# Altium PCB 2012_AVR.PcbDoc
Units mil, origin at the board's own origin, x right, y up, seen from the top; angles counter-clockwise.
Board outline 3543.31 x 2559.06 mil, 2 copper layers (Top Layer, Bottom Layer); 104 components, 103 nets, 433 pads, 213 vias.
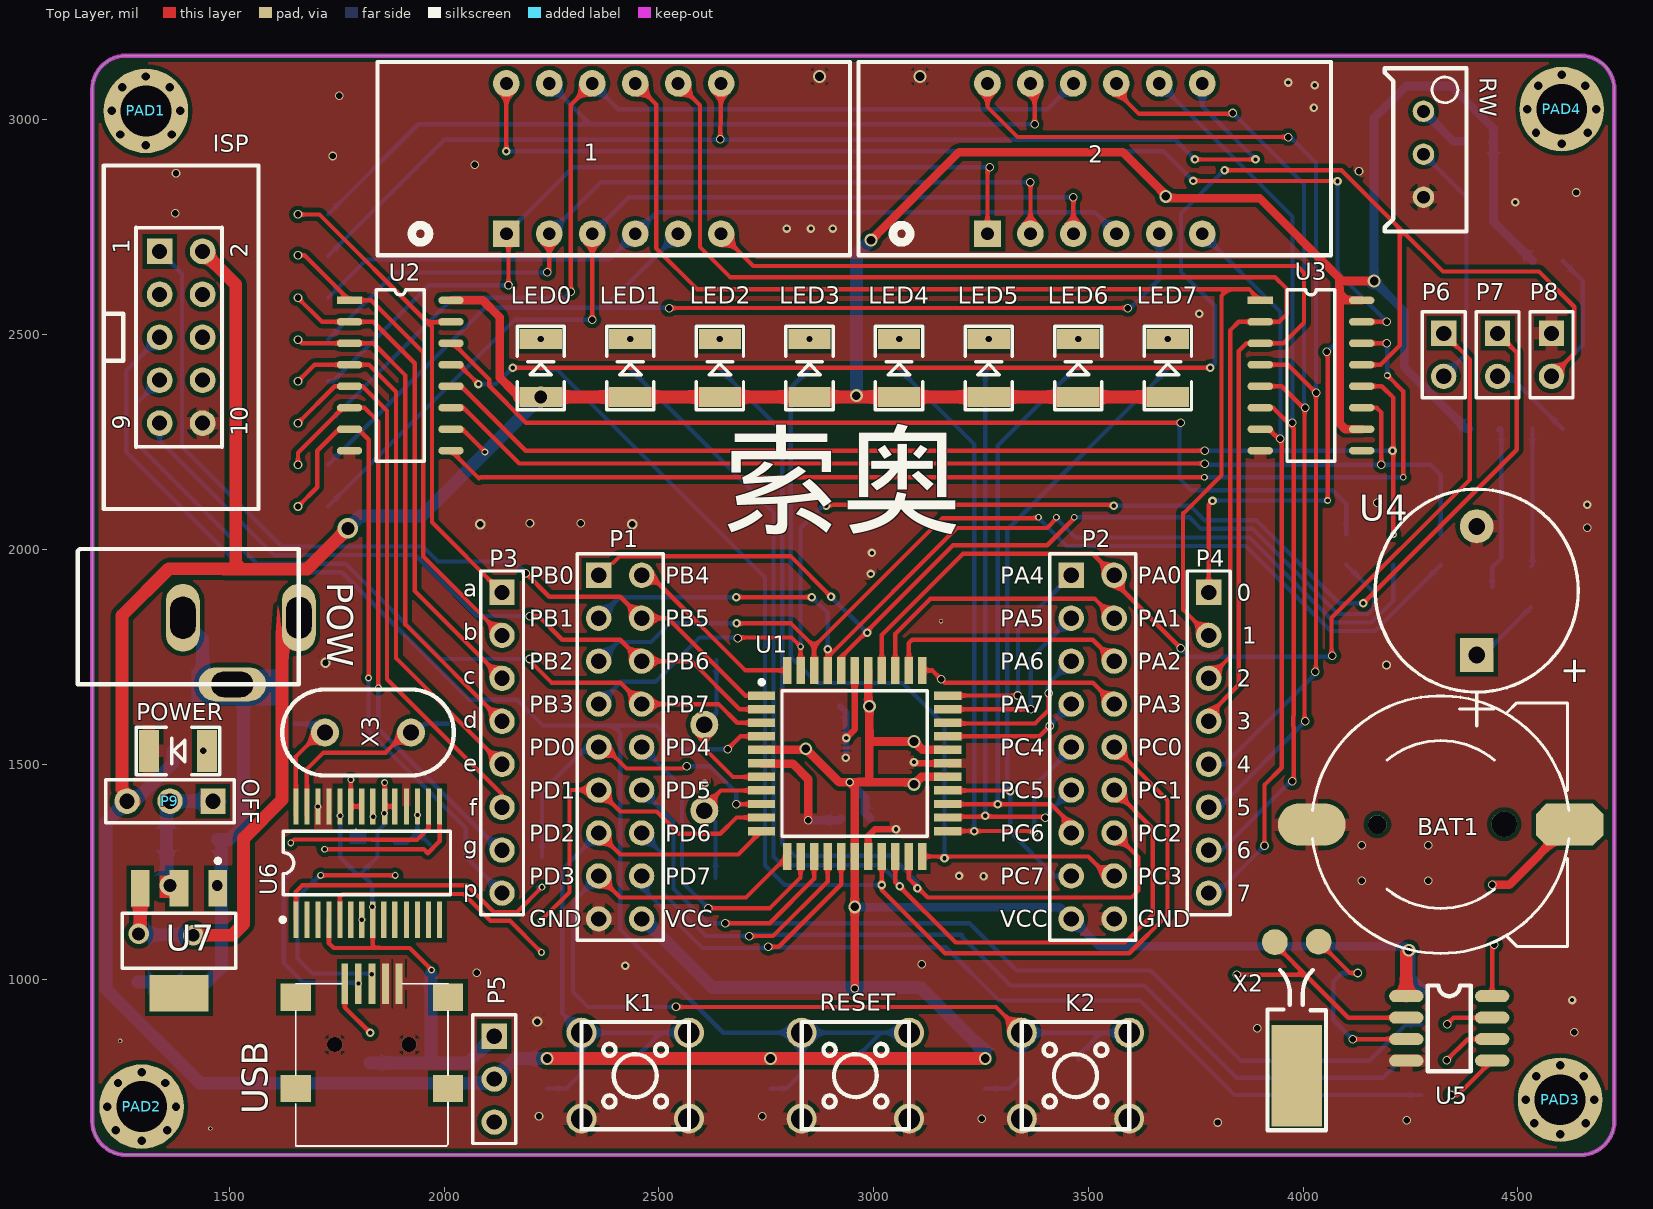
[diagram p0: Top Layer view]
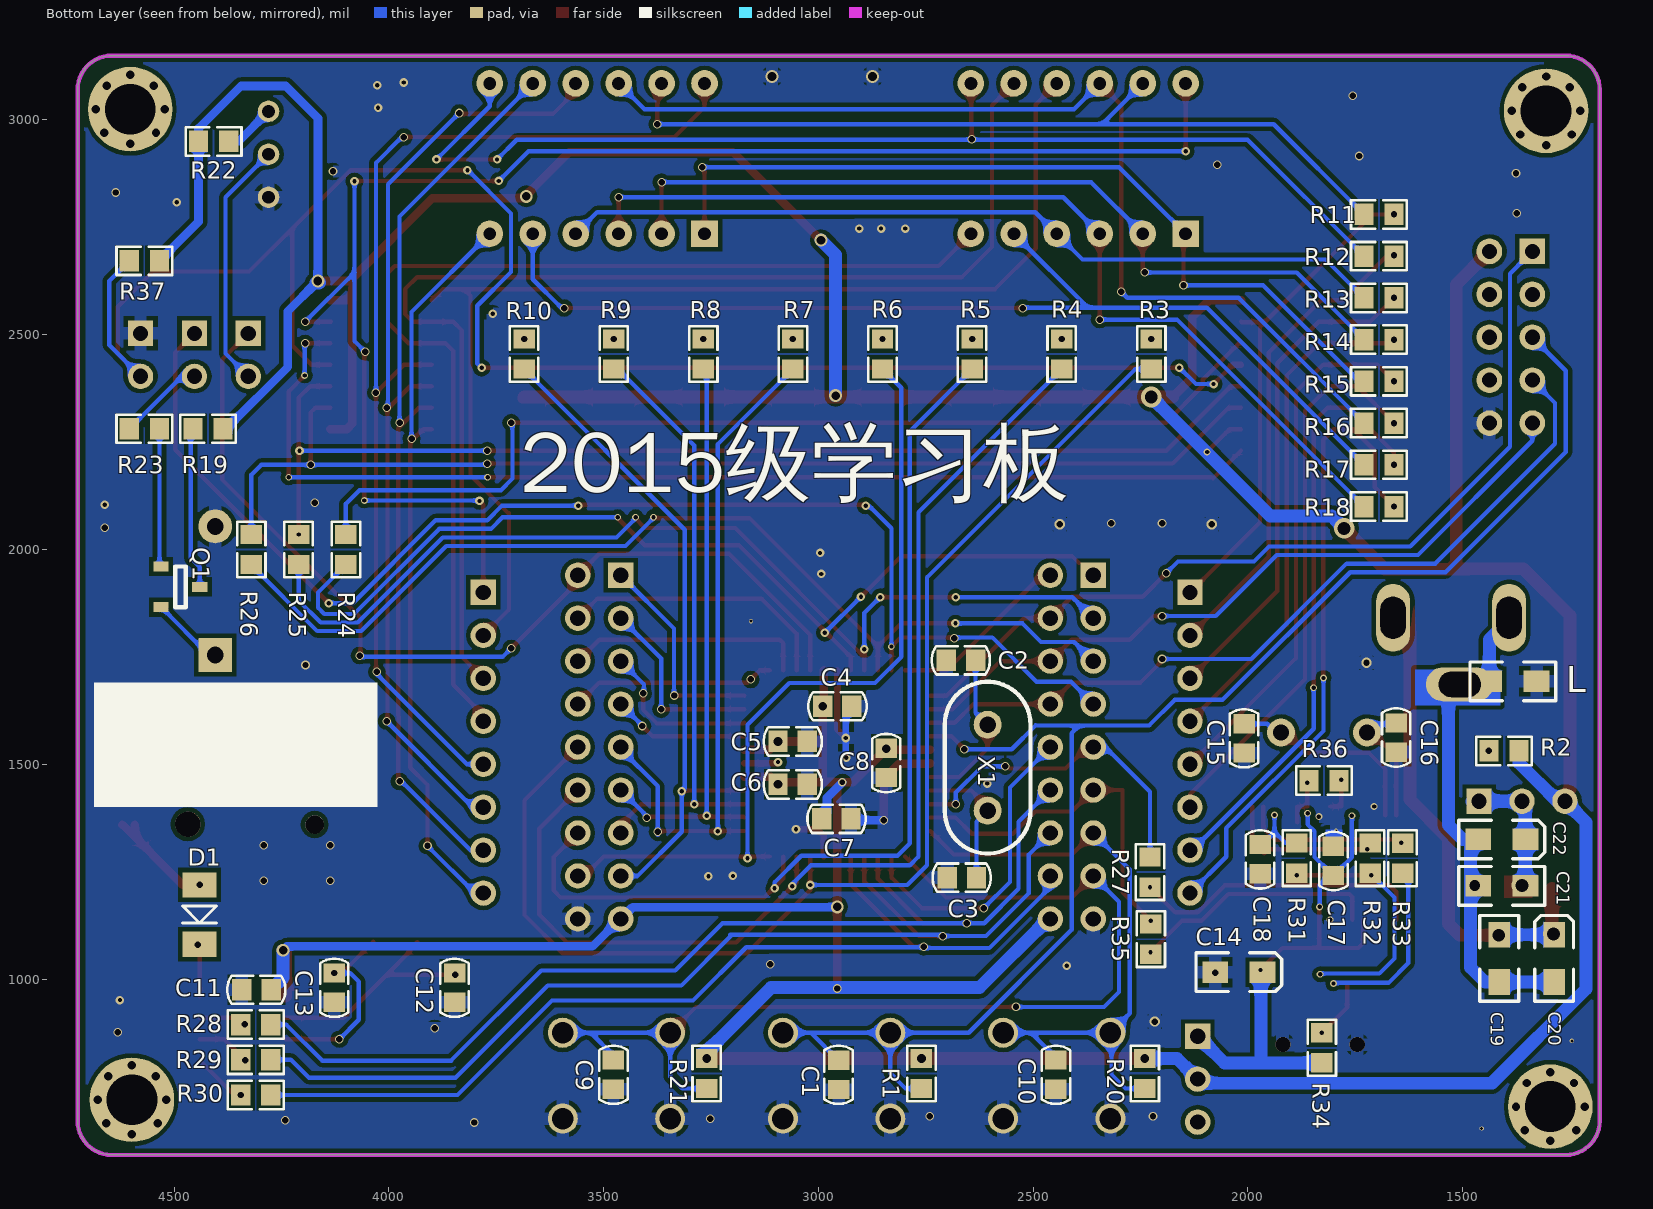
[diagram p1: Bottom Layer view, seen from below]

## Layer stack, top to bottom
Top Solder: solder mask 0.4, Solder Resist, Dk 3.5
Top Layer: signal copper 1.4
Dielectric1: dielectric 12.6, FR-4, Dk 4.8
Bottom Layer: signal copper 1.4
Bottom Solder: solder mask 0.4, Solder Resist, Dk 3.5

## Board outline
1181.1,669.29 1181.1,3070.87 cw(c1259.84,3070.87) 1259.84,3149.61 4645.67,3149.61 cw(c4645.67,3070.87) 4724.41,3070.87 4724.41,669.29 cw(c4645.67,669.29) 4645.67,590.55 1259.84,590.55 cw(c1259.84,669.29)

## Design rules (kind name [scope] priority, off if disabled: settings)
Clearance [All] p1: gap=10
ComponentClearance [All] p1: gap=0 collisioncheckmode=3 verticalgap=0 showdistances=FALSE
FabricationTestPointUsage TestPointUsage [All] p1: valid=0 allowmultiple=FALSE
FabricationTestpoint Testpoint [(IsPad And (OnTopLayer Or OnBottomLayer))] p1: side=3 testpointundercomponent=TRUE minsize=40 maxsize=100 preferedsize=60 minholesize=0 maxholesize=40 preferedholesize=32 testpointgrid=1 allowsidetop=TRUE allowsidebottom=TRUE usegrid=TRUE gridtolerance=0.01
HoleSize [All] p1: absolutevalues=TRUE maxlimit=393.7 minlimit=1 maxpercent=80.000 minpercent=20.000
HoleToHoleClearance [All] p1: gap=0 allowstackedmicrovias=TRUE
MinimumSolderMaskSliver [All] p1: minsoldermaskwidth=0
PolygonConnect [All] p1: connectstyle=Relief reliefconductorwidth=30 reliefentries=4 polygonreliefangle="90 Angle" airgapwidth=10
RoutingVias [All] p1: holewidth=28 width=50 viastyle="Through Hole" minholewidth=0 minwidth=0 maxholewidth=393.7 maxwidth=393.7
SilkToSilkClearance [All] p1: silktosilkclearance=0
SilkToSolderMaskClearance SilkscreenOverComponentPads [IsPad] p1: minsilkscreentomaskgap=0 clearancetoexposedcopper=TRUE
SolderMaskExpansion [All] p1: expansion=4
Width [All] p1: maxlimit=1000 minlimit=99999 preferedwidth=10 toplayer_minwidth=0 bottomlayer_minwidth=0 minimp=50.000000 maximp=50.000000 favimp=50.000000
22 further rules are at their usual default settings.

## Components (designator, comment, footprint, x,y, rotation, side; value= is the part's Value field where it differs from the comment)
1 "7SEG_1" DSP-4 2145,2735 r0 top
2 "7SEG_1" DSP-4 3265,2735 r0 top
BAT1 "BATTERY" BAT600 4620,1360 r270 top
C1 "0.1uF" C0704 2960,776.67 r270 bottom
C2 "20pF" C0704 2668,1735 r180 bottom
C3 "20pF" C0704 2666,1229 r180 bottom
C4 "0.1uF" C0704 2956,1642 r0 bottom
C5 "0.1uF" C0704 3060,1560 r0 bottom
C6 "0.1uF" C0704 3060,1460 r0 bottom
C7 "0.1uF" C0704 2958,1380 r0 bottom
C8 "0.1uF" C0704 2835,1503 r90 bottom
C9 "0.1uF" C0704 3470,777.5 r90 bottom
C10 "0.1uF" C0704 2440,777.5 r90 bottom
C11 "0.1uF" C0704 4308,968 r180 bottom
C12 "20pF" C0704 3840,980 r90 bottom
C13 "20pF" C0704 4120,980 r90 bottom
C14 "Cap Pol1" 3216C 1966,1016 r180 bottom
C15 "22pF" C0704 2016,1560 r270 bottom
C16 "22pF" C0704 1662,1562 r270 bottom
C17 "0.1uF" C0704 1794,1275 r90 bottom
C18 "0.1uF" C0704 1964.67,1279 r90 bottom
C19 "104" 0805 1395,1313 r90 bottom
C20 "10uF" 3216C 1287,1103 r90 bottom
C21 "104" 0805 1144,1197 r180 bottom
C22 "100uF" 3216C 1354,1325 r180 bottom
D1 "1N4148" D1206 4440,1220 r270 bottom
ISP "ISP2*5" ISP(2*5) 1338,2694 r90 top (schematic designator ISP1)
K1 "SWITCH-PB1" SW-6-6 2445,775 r270 top
K2 "SWITCH-PB1" SW-6-6 3470,775 r270 top
L "1K" 0805 1648,1713 r0 bottom
LED0 "LED" 1210LED 2225,2355 r90 top
LED1 "LED" 1210LED 2433.57,2355 r90 top
LED2 "LED" 1210LED 2642.14,2355 r90 top
LED3 "LED" 1210LED 2850.71,2355 r90 top
LED4 "LED" 1210LED 3059.29,2355 r90 top
LED5 "LED" 1210LED 3267.86,2355 r90 top
LED6 "LED" 1210LED 3476.43,2355 r90 top
LED7 "LED" 1210LED 3685,2355 r90 top
P1 "Header 9X2" HDR2X9 2360,1940 r270 top
P2 "Header 9X2" HDR2X9 3460,1940 r270 top
P3 "Header 8" HDR1X8 2135,1900 r270 top
P4 "Header 8" HDR1X8 3780,1900 r270 top
P5 "Header 3" HDR1X3 2117,867 r270 top (schematic designator P6)
P6 "Header 2" HDR1X2 4327,2503 r270 top (schematic designator P5)
P7 "Header 2" HDR1X2 4452.5,2503 r270 top
P8 "Header 2" HDR1X2 4578,2503 r270 top
P9 "Power Switch" HDR1X3 1462,1414 r180 top
PAD1 "hotpad" hot_pad 1306,3021 r0 top
PAD2 "hotpad" hot_pad 1296,703 r0 top
PAD3 "hotpad" hot_pad 4598,719 r0 top
PAD4 "hotpad" hot_pad 4602,3025 r0 top
POW "Power_IN" BAT_PORT 1662,1686 r180 top
POWER "LED" 1210LED 1448,1531 r180 top
Q1 "1AMNPN9013" CHIP 4499,1853 r270 bottom
R1 "Res2" R0704 2760,780 r90 bottom
R2 "1K" R0704 1404,1531 r0 bottom
R3 "1K" R0704 2225,2455 r270 bottom
R4 "1K" R0704 2433.57,2455 r270 bottom
R5 "1K" R0704 2642.14,2455 r270 bottom
R6 "1K" R0704 2850.71,2455 r270 bottom
R7 "1K" R0704 3059.29,2455 r270 bottom
R8 "1K" R0704 3267.86,2455 r270 bottom
R9 "1K" R0704 3476.43,2455 r270 bottom
R10 "1K" R0704 3685,2455 r270 bottom
R11 "1K*8" R0704 1695,2780 r0 bottom
R12 "1K" R0704 1695,2682.86 r0 bottom
R13 "1K" R0704 1695,2585.71 r0 bottom
R14 "1K" R0704 1695,2488.57 r0 bottom
R15 "1K" R0704 1695,2391.43 r0 bottom
R16 "1K" R0704 1695,2294.29 r0 bottom
R17 "1K" R0704 1695,2197.14 r0 bottom
R18 "1K" R0704 1695,2100 r0 bottom
R19 "1K" R0704 4421,2281 r0 bottom
R20 "Res2" R0704 2240,780 r270 bottom
R21 "Res2" R0704 3260,780 r270 bottom
R22 "1K" R0704 4408,2950 r180 bottom
R23 "Res2" R0704 4569,2281 r0 bottom
R24 "1K" R0704 4100,2000 r270 bottom
R25 "1K" R0704 4210,2000 r270 bottom
R26 "1K" R0704 4320,2000 r270 bottom
R27 "1K" R0704 2228,1249 r90 bottom
R28 "1K" R0704 4310,894 r0 bottom
R29 "1K" R0704 4310,812 r0 bottom
R30 "1K" R0704 4310,730 r0 bottom
R31 "1K" R0704 1886.33,1281.5 r90 bottom
R32 "1K" R0704 1715.67,1281.5 r270 bottom
R33 "1K" R0704 1640,1281 r270 bottom
R34 "1K" R0704 1828,840 r90 bottom
R35 "1K" R0704 2226,1093 r90 bottom
R36 "1K" R0704 1823,1462 r180 bottom
R37 "1K" R0704 4569,2672 r0 bottom
RESET "SWITCH-PB1" SW-6-6 2957.5,775 r270 top
RW "RPOT" RW 4280,3020 r270 top (schematic designator RW1)
U1 "ATmega16-16AC" "mega16 tie" 2956,1502 r0 top
U2 "74HC595" SOP16 1780,2580 r0 top
U3 "74HC595" SOP16 3900,2580 r0 top
U4 "Comment" SPEAKER 4404,1904 r90 top
U5 "DS1302" SO-8 4240,960 r0 top
U6 "PL2303" ssop28 1655,1138 r90 top
U7 "AMS1117-5.0" DSO-G3 1383,1089 r180 top
USB "micro_USB" USBfoot 1832,867 r90 top
X1 "16M" XTAL 2606,1392 r90 bottom
X2 "32.768KHz" XTAL-B 4000,840 r90 top
X3 "12M" XTAL 1923,1574 r180 top

## Footprints (in the part's own frame and the unit in brackets; to place one, negate y for a bottom-side part, rotate by r counter-clockwise, add the part's x,y. Pads: shape width x height; smd on the part's side, far side on the other; paste and mask are expansions set on the pad)
0805 [mil]
  rect 60x50 smd: 1(-210,20) 2(-320,20)
  silkscreen extent -365,-25 -165,65
1210LED [mm]
  rect 1.2x2.5 smd: 1(0,0) 2(3.429,0)
  silkscreen extent -0.76,-1.4 4.19,1.4
3216C [mil]
  rect 60x50 smd: 1(0,0) 2(-110,0)
  silkscreen extent -155,-45 45,45
BAT600 [mm]
  round 1.5 hole 1.5: 0(-0.014,-3.866)
  round 1.1 hole 1.1: 0(0.011,-11.366)
  oct 2.5x4 smd: 1(0.011,0.004)
  oval 2.5x4 smd: 2(0.011,-15.236)
  silkscreen extent -7.61,-15.19 7.63,-0.04
BAT_PORT [mm]
  oval 2x4 hole 1.5 slot 2.5 at 90 deg: 1(0,-3.937) 2(6.858,-3.937)
  oval 4x2 hole 1.5 slot 2.5 at 0 deg: 3(3.937,0)
  silkscreen extent 0,-8 13.08,0
C0704 [mil]
  rect 45x50 smd: 1(-34,7) 2(34,7)
  silkscreen extent -68,-26 67,40
CHIP [mm]
  rect 0.6x0.9 smd: 1(-0.324,-0.801) 2(-2.724,-0.801) 3(-1.524,1.499)
  silkscreen extent -2.72,0.05 -0.32,0.66
D1206 [mm]
  rect 1.5x2 smd: 1(0.025,-0.015) 2(3.525,-0.015)
  silkscreen extent 1.28,-1.02 2.28,0.98
DSO-G3 [mm]
  rect 1.1x2.15 smd: 1(-2.3,-3.1) 2(0,-3.1) 3(2.3,-3.1)
  rect 3.5x2.15 smd: 4(0,3.1)
  silkscreen extent -3.35,-4.85 3.35,1.62
DSP-4 [mil]
  rect 62x62 hole 30: 1(0,0)
  round 62 hole 30: 2(100,0) 3(200,0) 4(300,0) 5(400,0) 6(500,0) 7(500,350) 8(400,350) 9(300,350) 10(200,350) 11(100,350) 12(0,350)
  silkscreen extent -300,-50 800,400
HDR1X2 [mm] "Connector; Header; 2 Position"
  rect 1.5x1.5 hole 0.9: 1(0,0)
  round 1.5 hole 0.9: 2(2.54,0)
  silkscreen extent -1.27,-1.27 3.81,1.27
HDR1X3 [mm] "Connector; Header; 3 Position"
  rect 1.5x1.5 hole 0.9: 1(0,0)
  round 1.5 hole 0.9: 2(2.54,0) 3(5.08,0)
  silkscreen extent -1.27,-1.27 6.35,1.27
HDR1X8 [mm] "Connector; Header; 8 Position"
  rect 1.5x1.5 hole 0.9: 1(0,0)
  round 1.5 hole 0.9: 2(2.54,0) 3(5.08,0) 4(7.62,0) 5(10.16,0) 6(12.7,0) 7(15.24,0) 8(17.78,0)
  silkscreen extent -1.27,-1.27 19.05,1.27
HDR2X9 [mm]
  rect 1.5x1.5 hole 0.9: 1(0,0)
  round 1.5 hole 0.9: 2(0,2.54) 3(2.54,0) 4(2.54,2.54) 5(5.08,0) 6(5.08,2.54) 7(7.62,0) 8(7.62,2.54) 9(10.16,0) 10(10.16,2.54) 11(12.7,0) 12(12.7,2.54) 13(15.24,0) 14(15.24,2.54) 15(17.78,0) 16(17.78,2.54) 17(20.32,0) 18(20.32,2.54)
  silkscreen extent -1.27,-1.27 21.59,3.81
hot_pad [mm]
  round 0.8 hole 0.5: 0(-2.032,0) 0(-1.524,-1.397) 0(-1.397,1.397) 0(0,-2.032) 0(0,2.032) 0(1.397,1.397) 0(1.524,-1.397) 0(2.032,0)
  round 5 hole 3: 0(0,0)
ISP(2*5) [mil]
  rect 60x60 hole 35: 1(0,0)
  round 60 hole 35: 2(0,-100) 3(-100,0) 4(-100,-100) 5(-200,0) 6(-200,-100) 7(-300,0) 8(-300,-100) 9(-400,0) 10(-400,-100)
  silkscreen extent -600,-230 200,130
"mega16 tie" [mm]
  rect 1.6x0.5 smd: 1(-5.5,4) 2(-5.5,3.2) 3(-5.5,2.4) 4(-5.5,1.6) 5(-5.5,0.8) 6(-5.5,0) 7(-5.5,-0.8) 8(-5.5,-1.6) 9(-5.5,-2.4) 10(-5.5,-3.2) 11(-5.5,-4) 23(5.5,-4) 24(5.5,-3.2) 25(5.5,-2.4) 26(5.5,-1.6) 27(5.5,-0.8) 28(5.5,0) 29(5.5,0.8) 30(5.5,1.6) 31(5.5,2.4) 32(5.5,3.2) 33(5.5,4)
  rect 0.5x1.6 smd: 12(-4,-5.5) 13(-3.2,-5.5) 14(-2.4,-5.5) 15(-1.6,-5.5) 16(-0.8,-5.5) 17(0,-5.5) 18(0.8,-5.5) 19(1.6,-5.5) 20(2.4,-5.5) 21(3.2,-5.5) 22(4,-5.5) 34(4,5.5) 35(3.2,5.5) 36(2.4,5.5) 37(1.6,5.5) 38(0.8,5.5) 39(0,5.5) 40(-0.8,5.5) 41(-1.6,5.5) 42(-2.4,5.5) 43(-3.2,5.5) 44(-4,5.5)
  silkscreen extent -5.62,-4.3 4.3,4.92
R0704 [mil]
  rect 45x50 smd: 1(-35,0) 2(35,0)
  silkscreen extent -65,-33 65,33
RW [mil]
  round 50 hole 30: 1(0,0) 2(100,0) 3(200,0)
  silkscreen extent -100,-90 280,100
SO-8 [mil]
  oval 80x28 smd: 1(0,0) 2(0,-50) 3(0,-100) 4(0,-150) 5(200,-150) 6(200,-100) 7(200,-50) 8(200,0)
  silkscreen extent 50,-175 150,25
SOP16 [mm]
  rect 1.5x0.45 smd: 1(0,0)
  oval 1.5x0.45 smd: 2(0,-1.27) 3(0,-2.54) 4(0,-3.81) 5(0,-5.08) 6(0,-6.35) 7(0,-7.62) 8(0,-8.89) 9(6,-8.89) 10(6,-7.62) 11(6,-6.35) 12(6,-5.08) 13(6,-3.81) 14(6,-2.54) 15(6,-1.27) 16(6,0)
  silkscreen extent 1.59,-9.53 4.42,0.64
SPEAKER [mm]
  rect 2x2 hole 1: 1(-3.796,-0.001)
  round 2 hole 1: 2(3.804,-0.001)
  silkscreen extent -8,-6 6,6
ssop28 [mm]
  rect 2.15x0.305 smd: 1(0,0) 2(0,-0.65) 3(0,-1.3) 4(0,-1.95) 5(0,-2.6) 6(0,-3.25) 7(0,-3.9) 8(0,-4.55) 9(0,-5.2) 10(0,-5.85) 11(0,-6.552) 12(0,-7.202) 13(0,-7.852) 14(0,-8.502) 15(6.7,-8.502) 16(6.7,-7.852) 17(6.7,-7.202) 18(6.7,-6.552) 19(6.7,-5.85) 20(6.7,-5.252) 21(6.7,-4.55) 22(6.7,-3.9) 23(6.7,-3.25) 24(6.7,-2.6) 25(6.7,-1.95) 26(6.7,-1.3) 27(6.7,-0.65) 28(6.7,0)
  silkscreen extent -0.12,-9.14 5.22,0.9
SW-6-6 [mil]
  round 70 hole 50: 1(-100,125) 1(-100,-125) 2(100,125) 2(100,-125)
  silkscreen extent -125,-125 125,125
USBfoot [mm]
  rect 2.4x0.4 smd: 1(3.1,1.6) 2(3.1,0.8) 3(3.1,0) 4(3.1,-0.8) 5(3.1,-1.6)
  rect 1.6x1.8 smd: 6(2.3,-4.5) 7(2.3,4.5) 8(-3.1,4.5) 9(-3.1,-4.5)
  silkscreen extent -6.5,-4.5 3.1,4.5
XTAL [mil]
  round 65 hole 38: 1(0,0) 2(200,0)
  silkscreen extent -100,-100 300,100
XTAL-B [mil]
  rect 236.22x118.11 smd: 0(-65,15)
  round 60 smd: 1(246,66) 2(247,-36)
  silkscreen extent -192,-53 181,83

## Part data
1 2: library part 四?
C1 C2 C3 C4 C5 C6 C7 C8 C9 C10 C11 C12 C13 C15 C16 C17 C18 C19 C21: library part CAP, "Capacitor"
C14: "Polarized Capacitor (Radial)"
C20 C22: library part ELECTRO, "Electrolytic Capacitor"
D1: library part DIODE
ISP: "Header, 5-Pin, Dual row"
L R2 R3 R4 R5 R6 R7 R8 R9 R10 R11 R12 R13 R14 R15 R16 R17 R18 R19 R22 R24 R25 R26 R27 R28 R29 R30 R31 R32 R33 R34 R35 R36 R37: library part RES, "Resistor"
LED0 LED1 LED2 LED3 LED4 LED5 LED6 LED7 POWER: "Typical BLUE SiC LED"
P1 P2: "Header, 9-Pin, Dual row"
P3 P4: "Header, 8-Pin"
P5: "Header, 3-Pin"
P6 P7 P8: "Header, 2-Pin"
P9: library part CON3, "Connector"
PAD1 PAD2 PAD3 PAD4: library part HOT_PAD
POW: library part "Header 2", "Header, 2-Pin"
Q1: library part 9013
R1 R20 R21 R23: "Resistor"
RW: "Potentiometer"
U1: "8-Bit AVR Microcontroller with 16K Bytes of In-System Programmable Flash Memory"
U2 U3: library part 74HC595_1
U7: library part AS1117
USB: "手?"
X1 X3: library part CRYSTAL, "Crystal"
X2: library part CRYSTAL_1, "Crystal"

## Via types
v1: diameter 20, hole 15, Top Layer to Bottom Layer, 100 vias
v2: diameter 20, hole 10, Top Layer to Bottom Layer, 49 vias
v3: diameter 16, hole 10, Top Layer to Bottom Layer, 30 vias
v4: diameter 30, hole 20, Top Layer to Bottom Layer, 15 vias
v5: diameter 48, hole 30, Top Layer to Bottom Layer, 5 vias
v6: diameter 24, hole 15, Top Layer to Bottom Layer, 5 vias
v7: diameter 10, hole 7, Top Layer to Bottom Layer, 4 vias
v8: diameter 35.43, hole 35.43, Top Layer to Bottom Layer, 2 vias
v9: diameter 20, hole 13, Top Layer to Bottom Layer, 1 vias
v10: diameter 15, hole 10, Top Layer to Bottom Layer, 1 vias
v11: diameter 40, hole 25, Top Layer to Bottom Layer, 1 vias

## Nets (pads, with @x,y where several pads share a name; then routed paths per layer and width w, separated by ;. In a path a pad name is that pad's centre, name@x,y a point inside that pad or via, vN(x,y) a via of type N, cw(c..) or ccw(c..) an arc to the next point about the centre after c; other vN are vias at no path point)
A: 1.11 2.11 R11.2 | length 1965.5
  Top Layer w10: 2.11 3375,3075 v1(3375,2990)
  Bottom Layer w10: R11.2 1940,2990 2340,2990 ; 1.11 2340,2990 ; v1(3375,2990) 2340,2990
"A _PB0": R24.1 U2.14 | length 2398.9
  Top Layer w10: U2.14 2020.63,2480 2105,2395.63 2105,2380.95 2190.95,2295 v1(3715,2295)
  Bottom Layer w10: v1(3715,2295) 3712,2292 3712,2165 3739,2138 4068.36,2138 4100,2106.36 R24.1
B: 1.7 2.7 R12.2 | length 2648.7
  Top Layer w10: v1(2643,2955) 1.7 ; v2(3748,2908) v2(3889,2908)
  Bottom Layer w10: R12.2 2001.14,2954 3702,2954 v2(3748,2908) ; 2.7 3765,3032 v2(3889,2908)
C: 1.4 2.4 R13.2 | length 1938.3
  Bottom Layer w10: R13.2 1819.29,2675 2385,2675 1.4 2495,2785 3515,2785 2.4
D: 1.2 2.2 R14.2 | length 1956.6
  Top Layer w10: v1(2240,2645) 2245,2650 1.2 ; 2.2 v1(3365,2855)
  Bottom Layer w10: R14.2 1886.43,2645 v1(2240,2645) ; 1.2 2365,2855 v1(3365,2855)
DIG0: 1.12 P4.1 U3.15 | length 3582.9
  Top Layer w10: v2(2145,2927) 1.12 ; v2(3744,2858) 4079,2858 v2(4080,2857) ; P4.1 3780,2104 v2(3789,2113) ; v1(4055,2460) 4057,2458 v3(4057,2114) ; U3.15@4134.64,2530 U3.15 v1(4195,2530)
  Bottom Layer w10: v2(2145,2927) 3675,2927 v2(3744,2858) ; v2@3790,2114 v3(4057,2114) ; v1(4055,2460) 4080,2485 4080,2645 ; v2(4080,2857) 4080,2645 ; v1(4195,2530) 4080,2645
DIG1: 1.9 P4.2 U3.1 | length 2764.6
  Top Layer w10: 1.9 2494,3036 2494,2701 2589,2606 3854,2606 ; P4.2 3720,1860 3720,2085 3722.36,2085 3810,2172.64 3810,2590 3826,2606 3854,2606 ; U3.1 3874,2606 3854,2606
DIG2: 1.8 P4.3 U3.2 | length 2845.2
  Top Layer w10: 1.8 2596,3034 2596,2704 2666,2634 3934,2634 3962,2606 3962,2548 3944,2530 U3.2 3850,2530 3830,2510 3830,1750 P4.3
DIG3: 1.6 P4.4 U3.3 | length 2581
  Top Layer w10: 1.6 2720,2660 3986,2660 4002,2644 4002,2528 3954,2480 U3.3 3868,2480 3850,2462 3850,1684.94 3780,1614.94 P4.4
DIG4: 2.12 P4.5 U3.4 | length 2556.6
  Top Layer w10: 2.12 3265,3030 3335,2960 v1(3965,2960) ; U3.4 3965,2430 v1(4030,2365) 4030,1717 v1(4028,1715)
  Bottom Layer w10: P4.5 3818,1500 4028,1710 v1(4028,1715) ; v1(3965,2960) 3970,2960 4030,2900 v1(4030,2365)
DIG5: 2.9 P4.6 U3.5 | length 2226.5
  Top Layer w10: 2.9 3565,3067 3618,3014 3834,3014 v1(3836,3016) ; U3.5 3950,2380 v1@4002.5,2327.5 ; v1(4005,1600) 4003,1602 4003,2323 v1@4005,2325
  Bottom Layer w10: P4.6 3804.95,1400 v1@4004.95,1600 ; v1(3836,3016) 4002,2850 4002,2333 v1(4005,2330)
DIG6: 2.8 P4.7 U3.6 | length 2101.6
  Top Layer w10: U3.6 3930,2330 3978,2282 3978,1612.6 3977,1611.6 3977,1588.4 3978,1587.4 3978,1463 v1(3975,1460)
  Bottom Layer w10: 2.8 3975,2775 v1(3975,2295) ; P4.7 3809.95,1300 3969.95,1460 v1(3975,1460)
DIG7: 2.6 P4.8 U3.7 | length 1746.9
  Top Layer w10: U3.7 3920,2280 3950,2250 3950,1492 3910,1452 v1(3910,1310)
  Bottom Layer w10: 2.6 3947,2553 v1(3947,2258) ; P4.8 3800,1200 v1(3910,1310)
E: 1.1 2.1 R15.2 | length 2011.3
  Top Layer w10: 1.1 2150,2730 v1(2150,2615) ; 2.1 3265,2885 v1(3270,2890)
  Bottom Layer w10: R15.2 1741.43,2391.43 1965,2615 v1(2150,2615) ; 1.1 2300,2890 v1(3270,2890) ; 1.1@2161,2735 cw(c2199.63,2735) 1.1@2172.31,2762.31
F: 1.10 2.10 R16.2 | length 2367
  Top Layer w10: v1(2295,2600) 2295,3035 1.10
  Bottom Layer w10: R16.2 2021.71,2586 2281,2586 v1(2295,2600) ; 1.10 2405,3025 3405,3025 2.10
G: 1.5 2.5 R17.2 | length 2456.5
  Top Layer w10: v1(2524,2562) v1(3592,2562)
  Bottom Layer w10: R17.2 2095.86,2563 2373,2563 ; v1(2524,2562) 2523,2563 2373,2563 ; 1.5 2373,2563 ; v1@3599,2563 3665,2629 2.5
GND: BAT1.2 C1.2 C2.1 C3.1 C4.1 C5.1 C6.1 C7.1 C8.1 C9.1 C10.1 C11.1 C12.1 C13.1 C14.2 C15.2 C16.2 C17.2 C18.1 ISP.10 K1.2 K2.2 L.2 P1.17 P2.18 P8.1 POWER.2 RESET.2 RW.3 U1.6 U1.18 U1.28 U1.39 U2.8 U3.8 U4.2 U5.4 U6.7 U6.18 U6.21 U6.25 U6.26 USB.4 USB.5 | length 786.9
  Top Layer w15: v2(2936,1561) 2956,1581 U1.39 ; U1.18 2987.5,1333.5 3003,1349 v2(3052,1349) ; v2(3094,1505) 3097,1502 U1.28
  Top Layer w20: U1.6 2740.46,1501 2812,1501 2848,1465 v1(2848,1370)
  Bottom Layer w15: C4.1 2936,1621 v2(2936,1561) 2936,1516 v2(2935,1515)
  Bottom Layer w20: v1(2848,1370) 2921,1370 C7.1
  other v1: 3801,666 4241,671 3252,675 2221,681 2741,681 4631,876 3893,885 2076,1015 3112,1034 4136,1229 4291,1229 4136,1311 4291,1311 4194,1731 4661,2051 2200,2061 2318,2061 4172,2109 1374,2783 4636,2831 1376,2876 4130,2880 2071,2896 1741,2916 1756,3056
  other v2: 4626,951 2422,1031 3256,1239 3199,1240 2607,1455 2993,1943 2996,1992 4661,2104 3758,2549 2798,2747 2854,2747 2905,2747 4494,2808 4025,3028 4027,3081 3965,3087
  other v3: 1808.54,1138 1835,1378 1706.18,1401.78
  other v4: 2874,3101 3108,3101
  other v6: 2217,901 1724,1736 2084,2059 2438,2059
  other v7: 1456,652 1246,856 1795,1345 3157,1833
  other v8: 1745.39,847.32 1918.61,847.32
L_PB1: R25.1 U2.12 U3.12 | length 2656.9
  Top Layer w10: U2.12 2040,2380 2190,2230 v1(3771,2230) ; U3.12 4183,2380 4210,2353 v3(4210,2035)
  Bottom Layer w10: v1(3771,2230) v2(4208,2230)
NetBAT1_1: BAT1.1 D1.1 | length 292.3
  Top Layer w20: v1(4440.61,1219.01) 4479.58,1219.01 BAT1.1 ; BAT1.1@4571.09,1310.52 ccw(c4522.03,1359.58) BAT1.1@4591.42,1359.58
NetC12_2: C12.2 U5.2 X2.1 | length 541.8
  Top Layer w10: v1(3845,1010) 4005,1010 ; X2.1 3950,1070 3950,1065 4005,1010 ; U5.2 4105,910 4005,1010
NetC13_2: C13.2 U5.3 X2.2 | length 464.2
  Top Layer w10: X2.2 4109,1014 v1(4127,1014) ; v1(4115,860) U5.3
  Bottom Layer w10: v1(4115,860) 4070,905 4070,994 4090,1014 v1(4127,1014)
NetC15_1: C15.1 U6.27 X3.1 | length 484.9
  Top Layer w10: U6.27@1680.59,1380.78 U6.27 1680.59,1488.59 1718.5,1526.5 1742.68,1526.5 1743.18,1527 1864,1527 X3.1@1917,1580
  Bottom Layer w10: X3.1@1917,1580 X3.1 1935,1574 1955,1594 C15.1
NetC16_1: C16.1 U6.28 X3.2 | length 304.2
  Top Layer w10: U6.28@1655,1380.78 1655,1518 X3.2@1717,1580
  Bottom Layer w10: C16.1@1652,1594 1703,1594 X3.2
NetD1_2: D1.2 U5.8 | length 122.1
  Top Layer w10: U5.8 4440,1075 v1(4445,1080)
NetLED0_2: LED0.2 R3.1
  other v1: 2225,2490
NetLED1_2: LED1.2 R4.1
  other v1: 2433.57,2490
NetLED2_2: LED2.2 R5.1
  other v1: 2642.14,2490
NetLED3_2: LED3.2 R6.1
  other v1: 2850.71,2490
NetLED4_2: LED4.2 R7.1 | length 0.7
  Top Layer w10: LED4.2 v1(3060,2490)
NetLED5_2: LED5.2 R8.1
  other v1: 3267.86,2490
NetLED6_2: LED6.2 R9.1
  other v1: 3476.43,2490
NetLED7_2: LED7.2 R10.1
  other v1: 3685,2490
NetPOWER_1: POWER.1 R2.2
  other v6: 1439,1531
NetQ1_1: Q1.1 U4.1 | length 172.6
  Bottom Layer w10: U4.1 4419.36,1754.57 Q1.1
NetQ1_2: Q1.2 R23.1 | length 322.2
  Bottom Layer w10: Q1.2 4534,1963.69 R23.1
NetQ1_3: Q1.3 R19.2 | length 385.7
  Bottom Layer w10: Q1.3 4440,1958.94 4461.34,1980.29 4461.34,2281 R19.2 R19.2@4453.5,2278.5
NetR22_2: R22.2 RW.1 | length 122
  Bottom Layer w20: RW.1 4350,2950 R22.2
NetR27_1: R27.1 U6.1 | length 704.6
  Top Layer w10: U6.1 1655,1203 1670,1218 2053.36,1218 2053.7,1218.33 2116.56,1155.47 2169.47,1155.47 v3(2228,1214)
  Bottom Layer w10: R27.1@2218,1214 v3(2228,1214)
NetR28_2: R28.2 U5.7 | length 114.7
  Top Layer w10: v1@4331.5,895 v1(4335,895) 4350,910 U5.7
NetR29_2: R29.2 U5.6 | length 126.3
  Top Layer w10: v1(4334,811) 4383,860 U5.6
NetR30_2: R30.2 U5.5 | length 128.1
  Top Layer w10: v1(4345,730) 4360,730 U5.5
NetR31_1: R31.1 R32.2 USB.3 | length 586.7
  Top Layer w10: v3(1712.67,1241.33) v3(1886.33,1241.33)
  Bottom Layer w10: R32.2 1659,1189.83 1659,1048 1694,1013 1829,1013 v3@1830,1012 ; v3(1886.33,1241.33) R31.1
  other v3: 1832,1011
NetR33_2: R33.2 USB.2 | length 408.3
  Bottom Layer w10: R33.2 1626.64,1232.64 1626.64,1037.36 1673,991 1799.55,991 v3(1801,989.55)
NetR34_2: R34.2 USB.1 | length 138.5
  Top Layer w10: USB.1 1769.01,933.99 v2(1828,875)
NetR35_1: R35.1 U6.5 | length 581.9
  Top Layer w10: U6.5 1757.36,1191 1764.36,1198 2045.74,1198 2108.27,1135.47 2153.53,1135.47 v3(2227,1062)
NetR36_2: R36.2 U6.22 U6.23 | length 87.8
  Top Layer w10: v3(1783,1464) v3(1783,1464) U6.23 U6.22
OE: P8.2 R37.2 U2.13 U3.13 | length 4171.3
  Top Layer w10: U2.13@2035,2430 v2(2080,2385) ; v2(2160,2423) v2(3784,2423) ; v2(3817,2883) 4089.36,2883 4225,2747.36 ; U3.13 4180.36,2430 4225,2474.64 4225,2747.36 ; P8.2 4631,2456 4631,2565 4549,2647 4325.36,2647 4225,2747.36
  Top Layer w15: U2.13 U2.13@2035,2430
  Bottom Layer w10: v2(2080,2385) 2121,2385 2159,2423 v2(2160,2423) ; v2(3784,2423) 3794,2433 3794,2567.36 3715.36,2646 3715.36,2782.36 3817,2884 v2(3817,2883) ; P8.2 4651,2476 4651,2625 R37.2
P: 1.3 2.3 R18.2 | length 2225.4
  Top Layer w10: 2345,2545 1.3 ; 2.3 v1(3465,2820)
  Bottom Layer w10: R18.2 2165,2535 2335,2535 v1(2345,2535) ; 1.3 2430,2820 v1(3465,2820)
PA0: P2.2 P6.1 U1.37 | length 2228.7
  Top Layer w10: U1.37 3018.99,1800.99 3208,1990 3510,1990 P2.2 3560,1925 v1(3715,1770) ; v1(4068,1753) 4066,1755 4066,1841 4388,2163 4388,2442 P6.1
  Bottom Layer w10: v1(3715,1770) 3735,1750 4065,1750 v1(4068,1753)
PA0_0: P6.2 RW.2 | length 580.4
  Bottom Layer w10: RW.2 4380,2820 4380,2456 P6.2
PA1: P2.4 U1.36 | length 646.9
  Top Layer w10: U1.36 3050.49,1803.49 3132,1885 3515,1885 P2.4
PA2: P2.6 U1.35 | length 565.5
  Top Layer w10: U1.35 3081.98,1781.98 3090,1790 3510,1790 P2.6
PA3: P2.8 U1.34 | length 479.1
  Top Layer w10: U1.34 3136.46,1718.54 3165,1690 3510,1690 P2.8
  other v1: 3157.53,1697.47
PA4: P2.1 U1.33 | length 529.5
  Top Layer w10: U1.33 3173.06,1660 v1(3336,1660) ; P2.1@3453.06,1940 P2.1
  Bottom Layer w10: v1(3336,1660) 3336,1816 P2.1 ; P2.1@3435.2,1915.2 ccw(c3410.4,1940) P2.1@3445.47,1940
PA5: P2.3 U1.32 | length 445.2
  Top Layer w10: U1.32 3342.02,1627.98 3343,1627 3344,1628 v1(3366,1628)
  Bottom Layer w10: v1(3366,1628) 3366,1746 P2.3
PA6: P2.5 U1.31 | length 385.5
  Top Layer w10: U1.31 3174.02,1595 3376,1595 3408,1627 v1(3408,1665)
  Bottom Layer w10: v1(3408,1665) 3406,1667 3406,1686 P2.5
PA7: P2.7 U1.30 | length 318.8
  Top Layer w10: U1.30 3385.99,1564.99 v1(3410,1589)
  Bottom Layer w10: v1@3409.5,1589.5 P2.7
PB0: P1.1 R24.2 U1.40 | length 2313.1
  Top Layer w10: P1.1 P1.1@2365,1940 ; 2393.34,1968.34 2409.53,1984.53 2806.47,1984.53 v2(2901,1890) ; U1.40 2924.5,1749.59 3184.91,2010 3404.36,2010 3467,2072.64 v3(3467,2075) ; v2@2983.91,1807.09 v2(2985,1806)
  Bottom Layer w10: v2(2901,1890) v2(2985,1806) ; v3(3467,2075) 3735.36,2075 3762.36,2048 3882.72,2048 4080.72,1850 4150.36,1850 4165,1864.64 4165,1900 R24.2
PB1: P1.3 R25.2 U1.41 | length 2436
  Top Layer w10: v2(2680,1889) v2(2856,1889) ; U1.41 U1.41@2893.01,1749.37 ; v2(2893.01,1767.99) U1.41@2893.01,1749.37 ; v3@3426,2072 3404,2050 3193.42,2050 3046,1902.58 3046,1902.36 2908.67,1765.03 2908.45,1765.03 2899.66,1756.25 2899.66,1756.02 U1.41@2893.01,1749.37
  Bottom Layer w10: P1.3@2360,1854.53 ccw(c2360,1889.6) 2384.8,1864.8 ccw(c2409.6,1840) P1.3@2374.53,1840 ; P1.3@2360,1864.53 ccw(c2360,1923.74) 2401.87,1881.87 ; P1.3@2384.53,1840 cw(c2443.74,1840) 2401.87,1881.87 ; 2669,1889 2409,1889 2401.87,1881.87 ; v2(2856,1889) 2893.01,1851.99 v2(2893.01,1767.99) ; v3@3426,2072 3470,2028 3874.43,2028 4072.43,1830 4158.64,1830 4210,1881.36 R25.2
  other v3: 3425.5,2075
PB2: P1.5 R26.2 U1.42 | length 2461.3
  Top Layer w10: v2(2681,1828) 2807.82,1828 2861.51,1774.31 ; U1.42 2861.51,1774.31 ; v3@3384,2073 3160.2,2073 2861.51,1774.31
  Bottom Layer w10: P1.5@2360,1754.53 ccw(c2360,1789.6) 2384.8,1764.8 ccw(c2409.6,1740) P1.5@2374.53,1740 ; P1.5@2360,1764.53 ccw(c2360,1823.74) 2401.87,1781.87 ; P1.5@2384.53,1740 cw(c2443.74,1740) 2401.87,1781.87 ; v2(2681,1828) 2525,1828 2481.53,1784.53 2404.53,1784.53 2401.87,1781.87 ; v3@3384,2073 3449,2008 3866.15,2008 4064.15,1810 4166.92,1810 4320,1963.08 R26.2
  other v3: 3384,2075
PB3: P1.7 P7.1 U1.43 | length 3097.2
  Top Layer w10: v1(2684,1793) 2686,1795 2809,1795 v10(2830.02,1773.98) U1.43 ; v2(2890,2102) 2892,2104 3557,2104 v2(3559,2102) ; v2(4140,1875) 4497.03,2232.03 4497.03,2458.47 P7.1
  Bottom Layer w10: P1.7 2412,1692 2492,1692 2595,1795 2682,1795 v1(2684,1793) ; v10(2830.02,1773.98) 2830.02,2049.3 2882.72,2102 v2(2890,2102) ; v2(3559,2102) 3736.64,2102 3770.64,2068 3891,2068 4084,1875 v2(4140,1875)
PB3_3: P7.2 R23.2 | length 202
  Bottom Layer w10: P7.2 4482,2403 R23.2
PB4: P1.2 U1.44 | length 430.3
  Top Layer w10: P1.2 2480,1940 2701.46,1718.54 U1.44
PB5: ISP.1 P1.4 U1.1 | length 2069.2
  Top Layer w10: v1(2190,1945) 2245,1890 2410,1890 P1.4 2521,1840 2701.52,1659.48 U1.1
  Bottom Layer w10: ISP.1 1338,2688.64 1355.64,2671 1361,2671 1390,2642 1390,2239 1622,2007 1951,2007 1986,1972 2163,1972 v1(2190,1945)
PB6: ISP.9 P1.6 U1.2 | length 1701.4
  Top Layer w10: v1(2200,1845) 2220,1845 2275,1790 2410,1790 P1.6 2576,1740 2688.02,1627.98 U1.2
  Bottom Layer w10: ISP.9 1338,2253 1604,1987 1933,1987 2075,1845 v1(2200,1845)
PB7: ISP.7 P1.8 U1.3 | length 1898.1
  Top Layer w10: v1(2200,1745) 2197.67,1742.67 2250.34,1690 2410,1690 P1.8 2639,1640 2682.51,1596.49 U1.3
  Bottom Layer w10: ISP.7 1285,2341 1285,2246 1564,1967 1770.28,1967 1992.28,1745 v1(2200,1745)
PC0: P2.10 R3.2 U1.19 | length 2967.5
  Top Layer w10: U1.19 3018.99,1207.01 3166,1060 3595,1060 3684,1149 3684,1416 P2.10
  Bottom Layer w10: R3.2 2262,2420 2747,1935 2747,1265 2793,1219 v2(3019,1219)
PC1: P2.12 R4.2 U1.20 | length 2670.5
  Top Layer w10: U1.20 3050.49,1225.51 3191,1085 3585,1085 3650,1150 3650,1350 P2.12
  Bottom Layer w10: R4.2 2767,2086.57 2767,1285 2787,1265 3017,1265 3061,1221 v2(3061,1216)
PC2: P2.14 R5.2 U1.21 | length 2298.2
  Top Layer w10: U1.21 3081.98,1234.02 3126,1190 3600,1190 3616,1206 3616,1284 P2.14
  Bottom Layer w10: R5.2 2787,2275.14 2787,1316 2816,1287 3040,1287 3102,1225 v2(3102,1211)
PC3: P2.16 R6.2 U1.22 | length 1887.9
  Top Layer w10: U1.22 3499.59,1285.46 3545.06,1240 P2.16
  Bottom Layer w10: R6.2 2807,2376.29 2807,1750 2868,1689 3068,1689 3165,1592 v2(3165,1281)
PC4: P2.9 R7.2 U1.23 | length 1596.8
  Top Layer w10: U1.23 3371.98,1344.52 v1(3374,1342.5) v1@3374,1336
  Bottom Layer w10: R7.2 3234,2245.29 v2(3234,1344) ; v1@3374,1336 v1(3374,1342.5) 3374,1449 3460,1535 P2.9
PC5: P2.11 R8.2 U1.24 | length 1362.6
  Top Layer w10: U1.24 3174.52,1378 3397,1378 v1(3400,1375)
  Bottom Layer w10: v2(3260,1380) 3260,2412.14 R8.2 ; v1(3400,1375) 3400,1380 P2.11
PC6: P2.13 R9.2 U1.25 | length 1423.3
  Top Layer w10: U1.25 3173.05,1407 v2(3289,1407) 3413,1407 3460,1360 P2.13
  Bottom Layer w10: v2(3289,1407) 3289,2242 3467,2420 R9.2
PC7: P2.15 R10.2 U1.26 | length 1564.9
  Top Layer w10: U1.26 v2@3318,1439.01
  Bottom Layer w10: P2.15 3421,1240 3318,1343 v2(3318,1437) 3311,1444 3311,2046 R10.2
PD0: P1.9 R27.2 U1.9 | length 790.4
  Top Layer w10: P1.9 2374.94,1540 2424.94,1490 2555.06,1490 v1@2562.53,1497.47 ; v1(2680,1407) 2738.95,1407 U1.9
  Bottom Layer w10: R27.2 2228,1436 2332,1540 P1.9 P1.9@2370,1540 ; v1(2565,1495) 2619,1495 2680,1434 v1(2680,1407)
PD1: P1.11 R35.2 U1.10 | length 844.8
  Top Layer w10: v3(2226,1136) 2292,1202 2292,1440 P1.11 2410,1390 2495.06,1390 2547.06,1338 2643,1338 2681.02,1376.02 U1.10
  Bottom Layer w10: R35.2 v3(2226,1136)
PD2: C10.2 K1.1 P1.13 R20.2 U1.11 | length 1468.6
  Top Layer w10: P1.13 2410,1290 2684.94,1290 U1.11
  Bottom Layer w10: R20.2 2285,745 2317.47,777.47 2317.47,872.47 K1.1@2320,875 ; P1.13 2275,1255 2275,920 K1.1@2320,875 ; C10.2 2447,817 2505,875 ; K1.1@2570,875 2505,875 ; K1.1@2320,875 2505,875
PD3: C9.2 K2.1 P1.15 R21.2 U1.12 | length 2412
  Top Layer w10: P1.15 2410,1190 2703.06,1190 U1.12 ; v1(2540,935) 3285,935 K2.1@3345,875
  Bottom Layer w10: P1.15 2300,1180 2300,970 2335,935 v1(2540,935) ; R21.2 3317,745 3345,773 3345,875 3530,875 ; C9.2 3477,822 3530,875 ; K2.1@3595,875 3530,875
PD4: P1.10 U1.13 | length 733.1
  Top Layer w10: v1(2615,1165) 2759,1165 2830.02,1236.02 U1.13
  Bottom Layer w10: P1.10 2554,1446 2554,1226 v1(2615,1165)
PD5: P1.12 R28.1 U1.14 | length 2503.5
  Top Layer w10: v1(2655,1130) 2758,1130 2861.51,1233.51 U1.14
  Bottom Layer w10: P1.12 2534,1366 2534,1210 2614,1130 v1(2655,1130) 3223,1130 3333,1020 3645,1020 3855,810 4155,810 4239,894 R28.1
PD6: P1.14 R29.1 U1.15 | length 2420.1
  Top Layer w10: v1(2710,1100) 2766,1100 2893.01,1227.01 U1.15
  Bottom Layer w10: P1.14 2510,1290 2510,1200 2610,1100 v1(2710,1100) 2713,1103 3205,1103 3205,1099 3319,985 3630,985 3845,770 4186,770 4228,812 R29.1
PD7: P1.16 R30.1 U1.16 | length 2338.9
  Top Layer w10: v1(2755,1075) 2779,1075 2924.5,1220.5 U1.16
  Bottom Layer w10: P1.16 2460,1214 2602,1072 2753,1072 v1@2755,1074 ; v1(2755,1075) v1@2755,1074 ; R30.1 3840,730 3620,950 3292,950 3168,1074 v1@2755,1074
PGND: C19.2 C20.2 C21.2 C22.2 L.1 POW.2 POW.3 U7.1 | length 1137.8
  Bottom Layer w30: C20.2 C19.2 1448,993 1482,1027 1482,1316 1473,1325 1500.06,1325 1533.53,1358.47 1533.53,1654.47 1519,1669 1495,1693 L.1 1438,1790 POW.2@1404,1824
  other v11: 1472,1218
PL2303D+: R32.1 U6.15 | length 364
  Top Layer w10: v3(1722,1302) 1953,1302 1962,1293 1989.72,1320.72 U6.15
PL2303D-: R33.1 U6.16 | length 390.2
  Top Layer w10: v3(1643,1317) 1651,1325 1831,1325 1832,1324 1937.13,1324 1964.13,1351 U6.16
  Bottom Layer w10: R33.1 1642,1316 v3(1643,1317)
POWER: C21.1 C22.1 P9.1 P9.2 U7.2 | length 317.3
  Bottom Layer w30: C21.1 C22.1 1354,1406 P9.2 P9.1 ; P9.1@1462,1413 P9.1@1479,1413
  other v5: 1362,1218
POWERIN: C19.1 C20.1 POW.1 U7.3 | length 1131.1
  Top Layer w30: v5(1289,1105) 1292.45,1108.45 U7.3 ; v5(1416,1102) 1507,1102 1533.5,1128.5 1533.5,1328 1622.74,1417.24 1622.74,1801.74 POW.1
  Bottom Layer w30: C20.1 C19.1 v5(1416,1102)
QA: P3.1 R11.1 U2.15 | length 1189.2
  Top Layer w10: v1(1660,2780) 1710,2780 1961,2529 ; U2.15 2015.22,2529 1961,2529 ; P3.1@2110.2,1924.8 ccw(c2135,1949.6) P3.1@2135,1914.53 ; P3.1 1971.69,2063.31 1971.69,2518.31 1961,2529
QB: P3.2 R12.1 U2.1 | length 1119.8
  Top Layer w10: v1(1660,2685) 1675,2685 U2.1 1830,2580 1951.69,2458.31 1951.69,1983.31 P3.2
QC: P3.3 R13.1 U2.2 | length 1152.3
  Top Layer w10: v1(1660,2585.71) 1715.71,2530 U2.2 1835,2530 1931.69,2433.31 1931.69,1903.31 P3.3
QD: P3.4 R14.1 U2.3 | length 1182.8
  Top Layer w10: v1(1660,2488.57) 1668.57,2480 U2.3 1835,2480 1910,2405 1910,1825 P3.4
QE: P3.5 R15.1 U2.4 | length 1239.4
  Top Layer w10: v1(1660,2391.43) 1698.57,2430 U2.4 1825,2430 1888,2367 1888,1747 P3.5
QF: P3.6 R16.1 U2.5 | length 1300.1
  Top Layer w10: v1(1660,2294.29) 1745.71,2380 U2.5 1810,2380 1867,2323 1867,1698 2135,1430 P3.6
QG: P3.7 R17.1 U2.6 | length 1392.3
  Top Layer w10: v1(1660,2197.14) 1660,2225 1765,2330 U2.6 1815,2330 1845,2300 1844.53,2299.53 1847,2297.05 v3(1847,1678)
  Bottom Layer w10: v3(1847,1678) 1847,1582.82 2129.82,1300 P3.7
QP: P3.8 R18.1 U2.7 | length 1484.9
  Top Layer w10: v1(1660,2100) 1705,2145 1705,2230 1755,2280 U2.7 1800,2280 1824.53,2255.47 1824.53,1701.53 v3(1824,1701)
  Bottom Layer w10: v3(1824,1701) 1824,1577.54 2050.3,1351.24 2050.3,1284.7 P3.8 P3.8@2133.64,1200
RESET: C1.1 ISP.5 R1.1 RESET.1 U1.4 | length 3604.1
  Top Layer w10: v1(2660,1535) 2689.99,1564.99 U1.4
  Bottom Layer w10: ISP.5 1260,2416 1260,2227 1540,1947 1762,1947 2059,1650 2170.06,1650 2230.06,1590 2392.47,1590 ; v1(2660,1535) 2550.06,1535 2494.59,1590.46 2494.13,1590 2392.47,1590 ; R1.1 2797,745 2832.5,780.5 RESET.1@2832.5,875 ; C1.1 3015,872.67 3015,875 ; RESET.1@3082.5,875 3015,875 ; 2392.47,1590 2410,1572.47 2410,1115 2650,875 RESET.1@2832.5,875 ; RESET.1@2832.5,875 3015,875
S_PB2: R26.1 U2.11 U3.11 | length 2679.7
  Top Layer w10: U2.11 2045,2330 2175,2200 v1(3771,2200) ; U3.11 4171,2330 4182,2319 v1(4182,2197)
  Bottom Layer w10: v1(3771,2200) 3774,2197 v1(4182,2197) 4297,2197 4320,2174 R26.1
SQH_A: U2.9 U3.14 | length 2631.5
  Top Layer w10: U2.9 2081.22,2165 2084.22,2168 v3(3770,2168) ; U3.14 v1(4195,2480) ; v3(4196,2405) 4233,2368 v3(4233,2168)
  Bottom Layer w10: v3(3770,2168) v3(4233,2168) ; v1(4195,2480) 4196,2479 v3(4196,2405)
VCC: C4.2 C5.2 C6.2 C7.2 C8.2 C11.2 ISP.2 LED0.1 LED1.1 LED2.1 LED3.1 LED4.1 LED5.1 LED6.1 LED7.1 P1.18 P2.17 P5.2 P9.3 R1.2 R2.1 R19.1 R20.1 R21.1 R22.1 R37.1 U1.5 U1.17 U1.27 U1.29 U1.38 U2.10 U2.16 U3.10 U3.16 U5.1 | length 14968.7
  Top Layer w10: U2.10 2043,2280 2096,2227 v3(2095,2227)
  Top Layer w20: U2.16 2090,2580 2130,2540 2130,2400 2175,2355 ; U1.5 2839.5,1533.5 v4(2842,1536) 2920,1458 v9(2944,1458) ; v1(2956,978) v4(2956,1168) U1.17 2956,1446 v9(2944,1458) ; U1.38 2987.5,1637.5 v4(2990,1635) ; v4(2994,2720) 3199,2925 3580,2925 3681.5,2823.5 3681.5,2818 3898.22,2818 4084,2632.22 4084,2622 ; U1.27 3111.5,1470.5 v4(3094,1453) 3089,1458 2986,1458 ; U1.29 3113.5,1533.5 v4(3094,1553) 2993,1553 2990,1556 v4(2990,1635) ; LED7.1 LED7.1@3690,2350 ; U3.10 4098,2280 4085,2293 4085,2579 4084,2580 ; U3.16 4084,2580 ; v4(4165,2625) 4087,2625 4084,2622 ; v9(2944,1458) 2986,1458 ; 2986,1458 2990,1462 v4(2990,1635) ; 4084,2580 4084,2622
  Top Layer w30: P9.3@1279,1413 1250.1,1441.9 1250.1,1846.1 1359,1955 1489,1955 ; ISP.2 1515,2617 1515,1967 1527,1955 1489,1955 ; v5(1776,2049) 1681,1954 1488,1954 1489,1955 ; 2175,2355 v5(2225,2355) ; v4(2240,815) v4(2760,815) v4(3260,815) ; LED0.1@2240,2355 LED1.1 LED2.1 LED3.1 LED4.1 LED5.1 LED6.1 LED7.1 ; U5.1 4240,1061 v4(4246,1067)
  Bottom Layer w20: v9(2944,1458) 2980,1422 2980,1387 C7.2@2992,1375 ; v4(2956,1168) 2956.47,1167.53 3432.47,1167.53 P2.17 ; P2.17@3462,1140 3526,1076 v4@4237,1076 ; v4(3680,2822) v4@3683,2822 ; v4@4164.9,2625 4164.9,3003.9 4240,3079 4344,3079 4443,2980 R22.1 ; v4@4170,2620 4235,2555 4235,2424.96 4378.96,2281 R19.1 ; R22.1@4440,2947 R22.1 ; R37.1 4443,2763 R22.1
  Bottom Layer w30: P9.3 1213,1365 1213,976.64 1432.14,757.5 ; P9.3@1279,1413 1369,1503 R2.1 ; 1433.1,758.45 1434.05,757.5 2107.5,757.5 P5.2 2165,815 v4(2240,815) ; v5(1776,2049) 1805,2078 1948,2078 v5(2225,2355) ; P1.18 2465,1140 2625,980 3110,980 3260,830 v4(3260,815) ; v4(2960,2358) 2960,2686 v4(2994,2720) ; P2.17 P2.17@3462,1140 ; v4(4165,2625) 4164.9,2625 4161.64,2621.74 4161.64,2620.81 4162.45,2620 v4@4170,2620 ; v4(4246,1067) 4246,1003 C11.2
VCC_S: C14.1 C17.1 P5.1 R34.1 R36.1 U6.4 U6.8 U6.19 U6.20 U6.24 | length 1461.3
  Top Layer w10: U6.4 1731.77,1083.52 1743.29,1072 1839,1072 ; U6.8@1834.13,1168 U6.8 1834.13,1076.87 1839,1072 ; v3(1861.77,1457.23) U6.20 U6.19 U6.19@1885.31,1364.31 ; v3(1971,1021) 1971,1022 1970,1022 1920,1072 1839,1072
  Bottom Layer w10: v3(1758,1380) 1758,1283.29 1800.29,1241 C17.1 1801.71,1241 1845,1284.29 1845,1344 1861,1360 v3(1861,1386) ; C17.1@1800.29,1245 C17.1@1801.71,1245 ; C17.1@1813.86,1238.14 1833,1219 v3(1833,1168)
  Bottom Layer w30: R34.1 1828,804.6 2054.6,804.6 P5.1 ; 1970,807.6 C14.1@1970,1012
VDD3.3V: C18.2 R31.2 U6.17 | length 143.2
  Bottom Layer w10: R31.2 1912.5,1316.5 1938,1342 ; v3(1938,1382) 1938,1342 ; C18.2@1967,1313 1938,1342
XTAL1: C3.2 U1.8 X1.1 | length 325
  Top Layer w10: X1.1 2606,1401 2644.01,1439.01 U1.8
  Bottom Layer w10: X1.1 2632,1366 C3.2
XTAL2: C2.2 U1.7 X1.2 | length 377.6
  Top Layer w10: X1.2 2606,1537 2672.5,1470.5 U1.7
  Bottom Layer w10: X1.2 2634,1620 C2.2
pads on no net: BAT1.0 ISP.3 ISP.4 ISP.6 ISP.8 P5.3 PAD1.0 PAD2.0 PAD3.0 PAD4.0 U3.9 U6.2 U6.3 U6.6 U6.9 U6.10 U6.11 U6.12 U6.13 U6.14 U7.4 USB.6 USB.7 USB.8 USB.9 X2.0

## Polygon pours and split planes (outlines as drawn)
GND on Top Layer "Bottom Layer-No Net" (solid, remove dead copper, pour order 8): 1229.56,3143.96 4683.39,3143.96 4695.62,3131.73 4710,3117.35 4710,1984 4710,647.54 4653.39,590.93 4640.32,604 1252,604 1252,664 1188,728 1196,736 1196,3066 1196,3113.58 1222.72,3140.31
GND on Bottom Layer "Bottom Layer-No Net" (solid, remove dead copper, pour order 10): 1290,3139 1294.96,3143.96 4675.95,3143.96 4675.95,3018.05 4714,2980 4706,2972 4706,685 4671,685 4590,604 4585,599 1235,599 1235,698 1184,749 1188,753 1188,2989

## Keep-outs
Keep-Out Layer:
  the board outline again, w10

## Other copper
Top Layer:
  rectangle net POWER: 1337,1189 1404,1241
Bottom Layer:
  rectangle net PGND: 1412,1637 1611,1721
  rectangle net GND: 1780,1314 1819,1347.58

## Silkscreen, mask and mechanical layers (free items; w line width, h text height)
Top Overlay:
  text "索奥" at 2645,1995 h350
  text "PB0" at 2198.32,1920 h40
  text "PB4" at 2515,1920 h39.37
  text "PA4" at 3295,1920 h39.37
  text "PA0" at 3615,1920 h39.37
  text "a" at 2045,1890 h39.37
  text "0" at 3845,1880 h39.37
  text "PB1" at 2198.32,1820 h39.37
  text "PB5" at 2515,1820 h39.37
  text "PA5" at 3295,1820 h39.37
  text "PA1" at 3615,1820 h39.37
  text "b" at 2045,1788.13 h39.37
  text "1" at 3858.12,1780 h39.37
  text "+" at 4607,1751 h60 r270
  text "PB2" at 2198.32,1720 h39.37
  text "PB6" at 2515,1720 h39.37
  text "PA6" at 3295,1720 h39.37
  text "PA2" at 3615,1720 h39.37
  text "c" at 2045,1686.25 h39.37
  text "2" at 3845,1680 h39.37
  text "PB3" at 2198.32,1620 h39.37
  text "PB7" at 2515,1620 h39.37
  text "PA7" at 3295,1620 h39.37
  text "PA3" at 3615,1620 h39.37
  text "d" at 2045,1584.38 h39.37
  text "3" at 3845,1580 h39.37
  text "PD0" at 2198.32,1520 h39.37
  text "PD4" at 2515,1520 h39.37
  text "PC4" at 3295,1520 h39.37
  text "PC0" at 3615,1520 h39.37
  text "e" at 2045,1482.5 h39.37
  text "4" at 3845,1480 h39.37
  text "OFF" at 1530,1466 h40 r270
  text "PD1" at 2198.32,1420 h39.37
  text "PD5" at 2515,1420 h39.37
  text "PC5" at 3295,1420 h39.37
  text "PC1" at 3615,1420 h39.37
  text "f" at 2058.12,1380.63 h39.37
  text "5" at 3845,1380 h39.37
  text "PD2" at 2198.32,1320 h39.37
  text "PD6" at 2515,1320 h39.37
  text "PC6" at 3295,1320 h39.37
  text "PC2" at 3615,1320 h39.37
  text "g" at 2045,1291.87 h39.37
  text "6" at 3845,1280 h39.37
  text "PD3" at 2198.32,1220 h39.37
  text "PD7" at 2515,1220 h39.37
  text "PC7" at 3295,1220 h39.37
  text "PC3" at 3615,1220 h39.37
  text "p" at 2045,1190 h39.37
  text "7" at 3845,1180 h39.37
  text "GND" at 2198.32,1120 h39.37
  text "VCC" at 2515,1120 h39.37
  text "VCC" at 3295,1120 h39.37
  text "GND" at 3615,1120 h39.37
Bottom Overlay:
  rectangle: 4026,1400 4686,1690
  text "2015级学习板" at 3695,2085 h250

## Text inside footprints (layer, text, board x,y; h text height)
ISP: Top Overlay "10" at 1543,2264 h40 r90; Top Overlay "9" at 1268,2279 h40 r90; Top Overlay "2" at 1543,2679 h40 r90; Top Overlay "1" at 1268,2689 h40 r90